# Altium PCB DelSolClock.PcbDoc
Units mil, origin at the board's own origin, x right, y up, seen from the top; angles counter-clockwise.
Board outline 2513.78 x 2789.76 mil, 2 copper layers (Top Layer, Bottom Layer); 69 components, 58 nets, 275 pads, 72 vias.
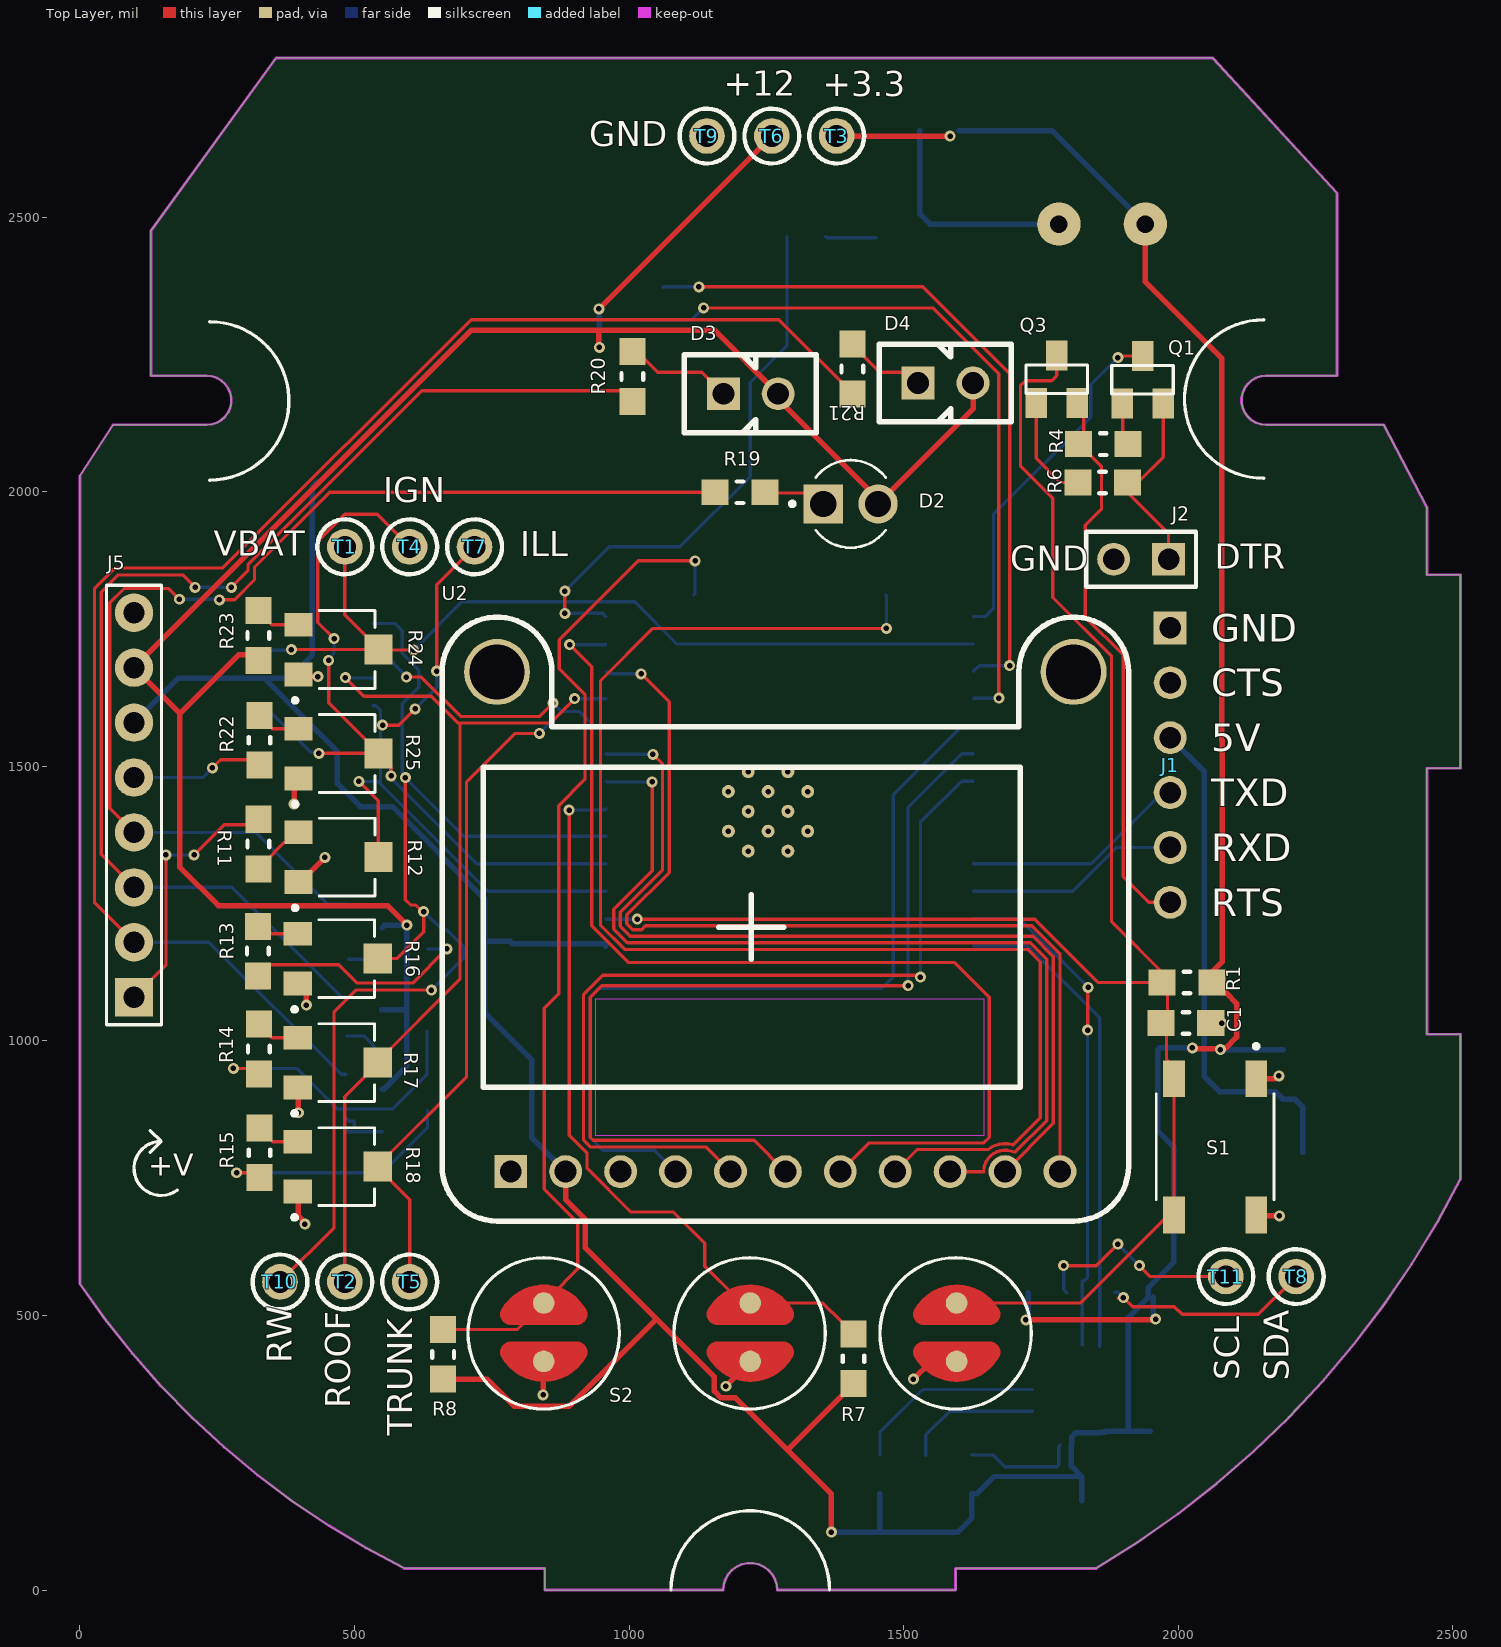
[diagram p0: Top Layer view]
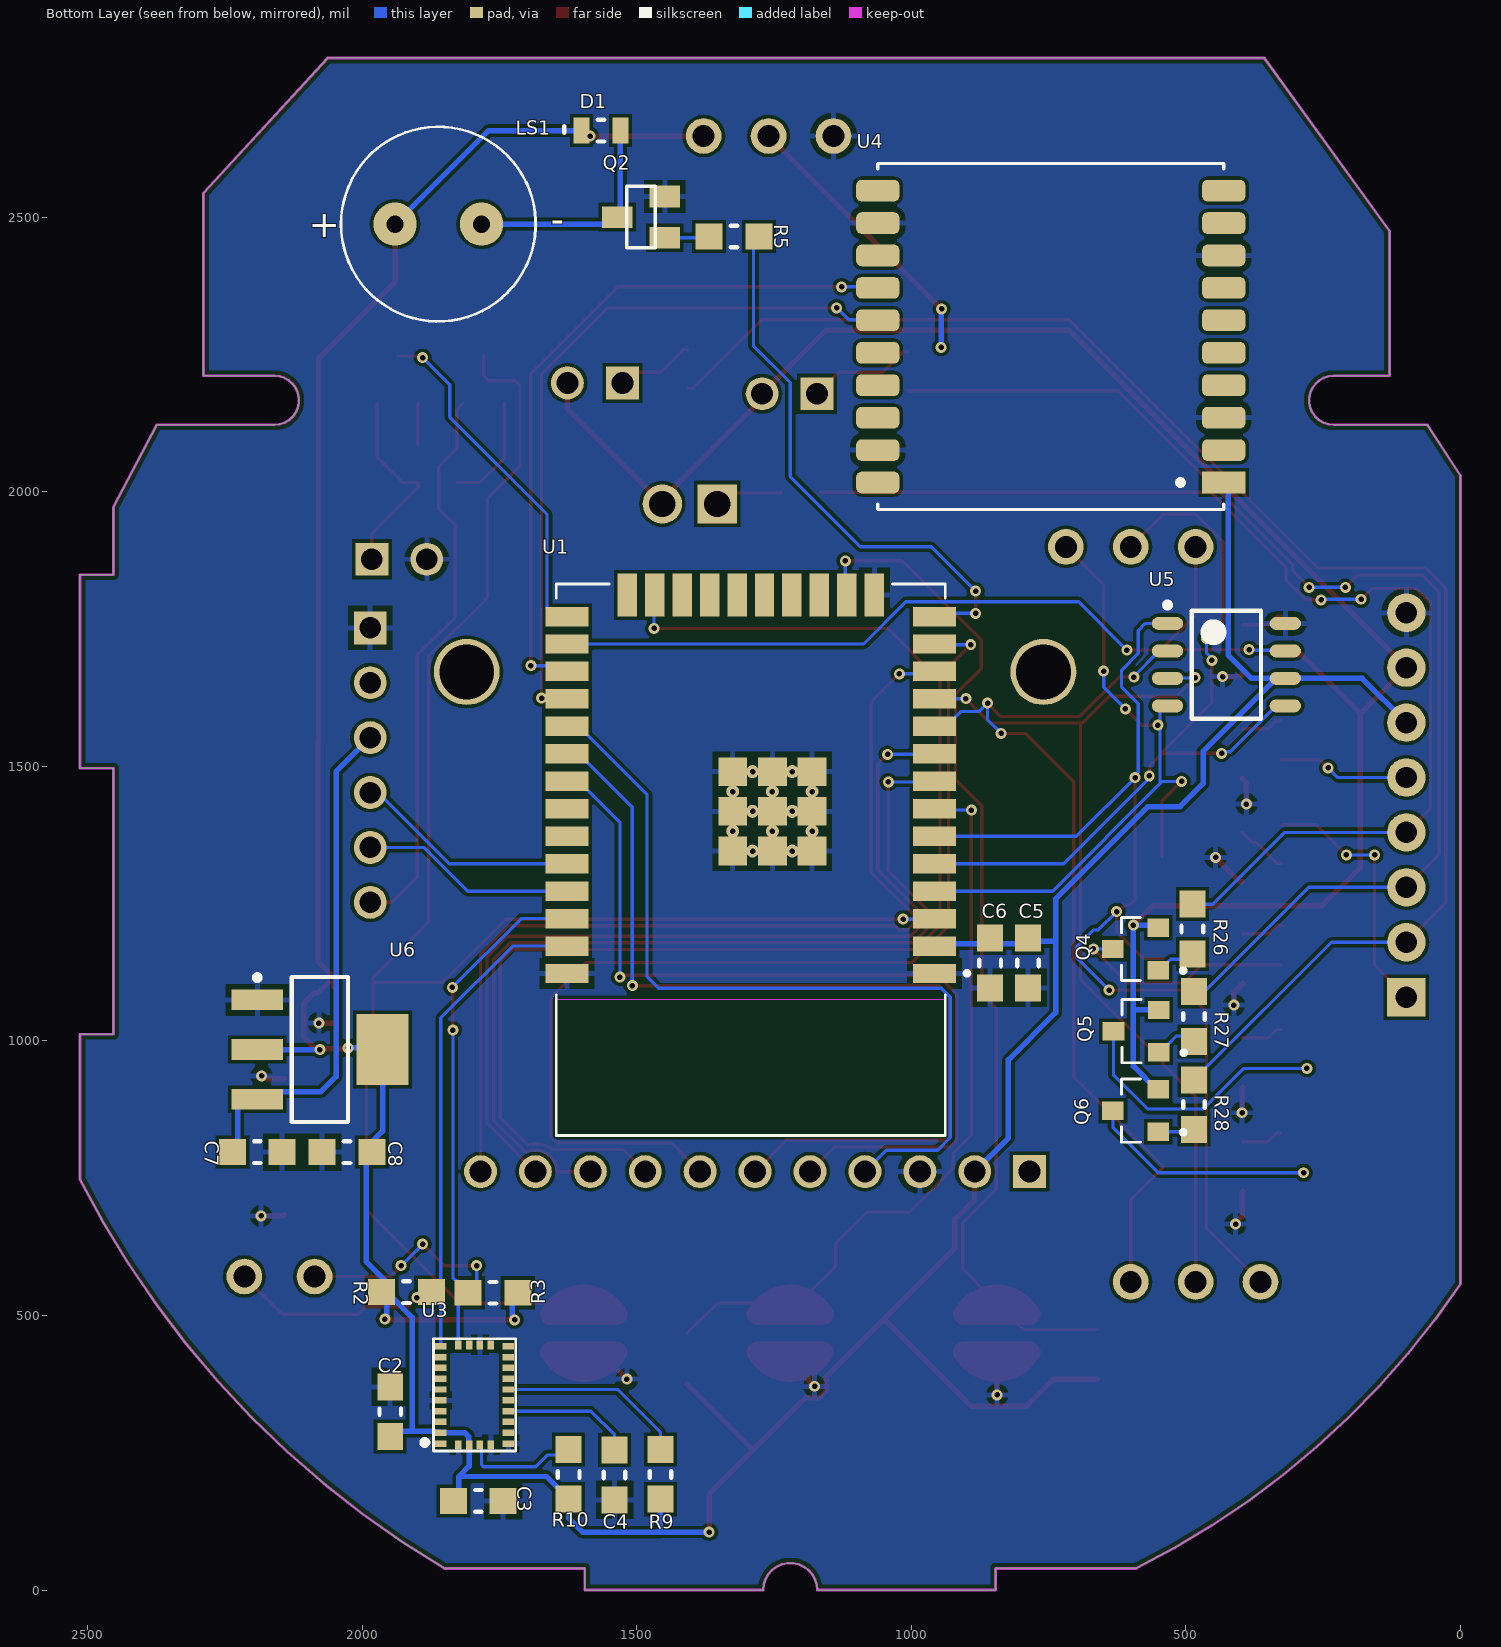
[diagram p1: Bottom Layer view, seen from below]

## Layer stack, top to bottom
Top Solder: solder mask 0.4, Solder Resist, Dk 3.5
Top Layer: signal copper 1.4
Dielectric 1: dielectric 12.6, FR-4, Dk 4.8
Bottom Layer: signal copper 1.4
Bottom Solder: solder mask 0.4, Solder Resist, Dk 3.5

## Board outline
0,2029.13 0,557.09 46.2,492.52 95.63,430.4 148.17,370.89 203.68,314.14 262.02,260.3 323.04,209.51 386.57,161.9 452.44,117.6 520.5,76.72 590.55,39.37 846.46,39.37 846.46,0 1171.26,0 1172.34,10.23 1175.51,20.02 1180.66,28.93 1187.54,36.57 1195.87,42.62 1205.27,46.8 1215.33,48.94 1225.62,48.94 1235.68,46.8 1245.08,42.62 1253.4,36.57 1260.29,28.93 1265.43,20.02 1268.61,10.23 1269.69,0 1594.49,0 1594.49,39.37 1850.39,39.37 1926.02,87.07 1999.11,138.57 2069.47,193.74 2136.92,252.43 2201.28,314.5 2262.39,379.77 2320.07,448.08 2374.19,519.25 2424.6,593.1 2471.17,669.42 2513.78,748.03 2513.78,1012.2 2452.76,1012.2 2452.76,1496.46 2513.78,1496.46 2513.78,1848.82 2452.76,1848.82 2452.76,1972.05 2374.02,2121.65 2159.65,2121.65 2150.36,2122.63 2141.47,2125.52 2133.38,2130.19 2126.44,2136.44 2120.95,2144 2117.15,2152.53 2115.21,2161.67 2115.21,2171.01 2117.15,2180.15 2120.95,2188.68 2126.44,2196.24 2133.38,2202.49 2141.47,2207.16 2150.36,2210.05 2159.65,2211.02 2288.98,2211.02 2288.98,2543.7 2062.6,2789.76 357.09,2789.76 129.13,2474.8 129.13,2211.02 230.91,2211.02 240.2,2210.05 249.08,2207.16 257.17,2202.49 264.11,2196.24 269.6,2188.68 273.4,2180.15 275.35,2171.01 275.35,2161.67 273.4,2152.53 269.6,2144 264.11,2136.44 257.17,2130.19 249.08,2125.52 240.2,2122.63 230.91,2121.65 60.24,2121.65

## Design rules (kind name [scope] priority, off if disabled: settings)
BoardOutlineClearance [All] p1: gap=10 ignorepadtopadclearanceinfootprint=FALSE
Clearance Clearance_POWER [InNetClass('POWER') vs IsTrack] p1: gap=6 ignorepadtopadclearanceinfootprint=FALSE
Clearance [All] p2: gap=6 ignorepadtopadclearanceinfootprint=FALSE
ComponentClearance [All] p1: gap=5 collisioncheckmode=3 verticalgap=10 showdistances=FALSE
HoleSize [All] p1: absolutevalues=TRUE maxlimit=500 minlimit=10 maxpercent=80.000 minpercent=20.000
HoleToHoleClearance [All] p1: gap=6 allowstackedmicrovias=TRUE
MinimumSolderMaskSliver [All] p1: minsoldermaskwidth=3
PolygonConnect [All] p1: connectstyle=Relief reliefconductorwidth=10 reliefentries=4 polygonreliefangle="90 Angle" airgapwidth=10
RoutingVias [All] p1: holewidth=10 width=20 viastyle="Through Hole" minholewidth=10 minwidth=20 maxholewidth=10 maxwidth=20
SilkToSilkClearance [All] p1: silktosilkclearance=6
SilkToSolderMaskClearance [IsPad] p1 off: minsilkscreentomaskgap=6 clearancetoexposedcopper=TRUE
SolderMaskExpansion [All] p1: expansion=4 istentingtop=FALSE
Width Width_High_Power [InNetClass('HIGH_POWER')] p1: maxlimit=70 minlimit=70 preferedwidth=70
Width Width_Power [InNetClass('POWER')] p2: maxlimit=70 minlimit=10 preferedwidth=10 minimp=50.000000 maximp=50.000000 favimp=50.000000
Width [All] p3: maxlimit=60 minlimit=6 preferedwidth=6 minimp=50.000000 maximp=50.000000 favimp=50.000000
24 further rules are at their usual default settings.

## Classes and differential pairs
net class POWER: 3V3 +12 GND NetC7_2 NetD1_2

## Components (designator, comment, footprint, x,y, rotation, side; value= is the part's Value field where it differs from the comment)
C1 "CL21B105KOFNNNG" "0805 HD - Long" 2013.78,1032.48 r180 top value=1uF
C2 "CL21B104KBCNFNC" "0805 HD - Long" 1948.82,324.8 r90 bottom value=100nF
C3 "CC0805KRX7R9BB124" "0805 HD - Long" 1788.39,162.4 r180 bottom value=120nF
C4 "CL21B105KOFNNNG" "0805 HD - Long" 1540.35,209.65 r90 bottom value=1uF
C5 "Cap" "0805 HD - Long" 787.4,1141.73 r90 bottom value=22uF
C6 "Cap" "0805 HD - Long" 856.3,1141.73 r90 bottom value=0.1uF
C7 "Cap" "0805 HD - Long" 2190.94,797.24 r0 bottom value=10uF
C8 "Cap" "0805 HD - Long" 2027.56,797.24 r180 bottom value=100uF
D1 "SD0805S020S1R0" "0805 HD - Polarized" 1564.96,2657.48 r180 bottom
D2 "WP132XGD" LEDRD254W50D405H1055 1403.35,1977.76 r0 top locked
D3 "SSL-LX4673ID-LA20" "LED, SSL-LX4673ID-LA20" 1221.46,2178.35 r0 top locked
D4 "SSL-LX4673ID-LA20" "LED, SSL-LX4673ID-LA20" 1576.18,2198.03 r0 top locked
J1 "3309" "Conn, 3309" 1985.24,1752.17 r0 top
J2 "90120-0122" "CONN, HEADER, 2x1 0.1 Pitch Unshrouded" 1982.28,1876.97 r180 top
J5 "68000-408HLF" "Conn, Header, 8x1 0.1 Pitch Unshrouded" 98.43,1079.53 r90 top
LS1 "CMT-0904-83T" XDCR_CMT-0904-83T 1861.22,2487.2 r180 bottom
Q1 "MMBT2222A" SOT23 1935.04,2203.74 r0 top
Q2 "MMBT2222A" SOT23 1492.13,2500 r90 bottom
Q3 "MMBT2222A" SOT23 1778.54,2204.72 r0 top
Q4 "MMBT2907A" TRANS_MMBT2907A 591.54,1167.32 r0 bottom
Q5 "MMBT2907A" TRANS_MMBT2907A 590.55,1017.72 r0 bottom
Q6 "MMBT2907A" TRANS_MMBT2907A 591.54,873.03 r0 bottom
R1 "RNCP0805FTD10K0" "0805 HD - Long" 2015.75,1106.3 r0 top value=10K
R2 "AC0805FR-7W2KL" "0805 HD - Long" 1919.29,542.32 r0 bottom value=2K
R3 "AC0805FR-7W2KL" "0805 HD - Long" 1761.81,541.34 r180 bottom value=2K
R4 "RNCP0805FTD10K0" "0805 HD - Long" 1863.19,2086.61 r180 top value=10K
R5 "ESR10EZPJ181" "0805 HD - Long" 1322.83,2464.57 r0 bottom value=180
R6 "RNCP0805FTD10K0" "0805 HD - Long" 1862.2,2016.73 r0 top value=10K
R7 "CRGH0805J1K0" "0805 HD - Long" 1408.46,421.26 r270 top value=1K
R8 "CRGH0805J1K0" "0805 HD - Long" 661.42,429.13 r270 top value=1K
R9 "RNCP0805FTD10K0" "0805 HD - Long" 1456.69,210.63 r90 bottom value=10K
R10 "RNCP0805FTD10K0" "0805 HD - Long" 1624.02,210.63 r90 bottom value=10K
R11 "CRGH0805J1K0" "0805 HD - Long" 324.8,1358.27 r90 top value=1K
R12 "PVG3G104C01R00" TRIM_PVG3G104C01R00 470.47,1334.65 r90 top
R13 "CRGH0805J1K0" "0805 HD - Long" 323.82,1163.39 r270 top value=1K
R14 "CRGH0805J1K0" "0805 HD - Long" 325.79,985.24 r270 top value=1K
R15 "CRGH0805J1K0" "0805 HD - Long" 326.77,796.26 r270 top value=1K
R16 "PVG3G104C01R00" TRIM_PVG3G104C01R00 469.49,1149.8 r90 top
R17 "PVG3G104C01R00" TRIM_PVG3G104C01R00 469.49,960.43 r90 top
R18 "PVG3G104C01R00" TRIM_PVG3G104C01R00 469.49,771.06 r90 top
R19 "ESR10EZPJ471" "0805 HD - Long" 1201.77,1999.02 r0 top value=470
R20 "ESR10EZPJ471" "0805 HD - Long" 1005.91,2209.65 r90 top value=470
R21 "ESR10EZPJ471" "0805 HD - Long" 1406.5,2223.43 r90 top value=470
R22 "CRGH0805J1K0" "0805 HD - Long" 326.77,1547.24 r90 top value=1K
R23 "CRGH0805J1K0" "0805 HD - Long" 324.8,1738.19 r90 top value=1K
R24 "PVG3G104C01R00" TRIM_PVG3G104C01R00 470.47,1712.6 r90 top
R25 "PVG3G104C01R00" TRIM_PVG3G104C01R00 470.47,1523.23 r90 top
R26 "CRGH0805J100K" "0805 HD - Long" 488.19,1203.74 r270 bottom value=100K
R27 "CRGH0805J100K" "0805 HD - Long" 485.24,1044.29 r270 bottom value=100K
R28 "CRGH0805J100K" "0805 HD - Long" 485.24,883.86 r270 bottom value=100K
S1 "8-1437565-0" SW_8-1437565-0 2066.93,807.09 r270 top
S2 "Sw, DelSolClock" "SW, DELSOLCLOCK" 844.49,467.52 r0 top locked
T1 "Test Point" "5002 Test Point" 482.28,1899.61 r0 top
T2 "Test Point" "5002 Test Point" 482.28,561.02 r0 top
T3 "Test Point" "5002 Test Point" 1377.95,2647.64 r0 top
T4 "Test Point" "5002 Test Point" 600.39,1899.61 r0 top
T5 "Test Point" "5002 Test Point" 600.39,561.02 r0 top
T6 "Test Point" "5002 Test Point" 1259.84,2647.64 r0 top
T7 "Test Point" "5002 Test Point" 718.5,1899.61 r0 top
T8 "Test Point" "5002 Test Point" 2214.57,570.87 r0 top
T9 "Test Point" "5002 Test Point" 1141.73,2647.64 r0 top
T10 "Test Point" "5002 Test Point" 364.17,561.02 r0 top
T11 "Test Point" "5002 Test Point" 2086.61,570.87 r0 top
U1 "ESP-WROOM-32" "MODULE, ESP32-WROOM-32" 1292.32,1329.72 r0 bottom
U2 "4383" "MODULE, ADAFRUIT TFT" 659.45,671.81 r0 top locked
U3 "BNO055" LGA28R50P4X10_380X520X100 1795.28,355.32 r90 bottom
U4 "CD-PA1616D" "MODULE, CD-PA1616D" 431.1,2016.73 r0 bottom
U5 "DA112S1RL" "IC, DA112S1RL" 426.18,1685.04 r180 bottom
U6 "TLV1117-33CDCYR" "SOT230P700X180-4N Regulator 3.3V 800mA" 2076.77,984.25 r180 bottom

## Footprints (in the part's own frame and the unit in brackets; to place one, negate y for a bottom-side part, rotate by r counter-clockwise, add the part's x,y. Pads: shape width x height; smd on the part's side, far side on the other; paste and mask are expansions set on the pad)
"0805 HD - Long" [mm] "Chip Resistor, 2-Leads, Body 2.00x1.25mm, IPC High Density"
  rect 1.25x1.2 smd: 1(-1.15,0) 2(1.15,0)
  silkscreen extent -0.15,-0.5 0.15,0.5, body extent -1,-0.63 1,0.63, height 0.95
"0805 HD - Polarized" [mm] "Chip Resistor, 2-Leads, Body 2.00x1.25mm, IPC High Density"
  rect 0.75x1.2 smd: 1(-0.9,0) 2(0.9,0)
  silkscreen extent -1.7,-0.5 0.15,0.5, body extent -1,-0.63 1,0.63, height 0.95
"5002 Test Point" [mil]
  round 65 hole 40: 1(0,0)
  silkscreen extent -50,-50 50,50
"Conn, 3309" [mil]
  rect 60x60 hole 39: 1(0,0)
  round 60 hole 39: 2(0,-100) 3(0,-200) 4(0,-300) 5(0,-400) 6(0,-500)
"CONN, HEADER, 2x1 0.1 Pitch Unshrouded" [mil]
  rect 60x60 hole 39: 1(0,0)
  round 60 hole 39: 2(100,0)
  silkscreen extent -50,-50 150,50
"Conn, Header, 8x1 0.1 Pitch Unshrouded" [mil] "Header, 8x1 0.1 Pitch Unshrouded"
  rect 70x70 hole 39: 1(0,0)
  round 70 hole 39: 2(100,0) 3(200,0) 4(300,0) 5(400,0) 6(500,0) 7(600,0) 8(700,0)
  silkscreen extent -50,-50 750,50
"IC, DA112S1RL" [mm] "SOIC, 8-Leads, Body 4.90x3.90mm, Pitch 1.27mm, IPC Medium Density"
  oval 1.45x0.6 smd: 1(-2.725,1.905) 2(-2.725,0.635) 3(-2.725,-0.635) 4(-2.725,-1.905) 5(2.725,-1.905) 6(2.725,-0.635) 7(2.725,0.635) 8(2.725,1.905)
  silkscreen extent -2.85,-2.5 1.6,2.88, body extent -2,-2.5 2,2.5, height 1.75
"LED, SSL-LX4673ID-LA20" [mil]
  rect 60x60 hole 40: 1(-50,0)
  round 60 hole 40: 2(50,0)
  silkscreen extent -121,-71 119,71
LEDRD254W50D405H1055 [mm]
  round 1.815 hole 1.21: A(1.27,0)
  rect 1.815x1.815 hole 1.21: C(-1.27,0)
  silkscreen extent -2.8,-2.03 1.62,2.03
LGA28R50P4X10_380X520X100 [mm]
  rect 0.3x0.525 smd: 1(-2.25,1.563) 6(-2.25,-1.562) 7(-1.75,-1.562) 8(-1.25,-1.562) 9(-0.75,-1.562) 10(-0.25,-1.562) 11(0.25,-1.562) 12(0.75,-1.562) 13(1.25,-1.562) 14(1.75,-1.562) 15(2.25,-1.562) 20(2.25,1.563) 21(1.75,1.563) 22(1.25,1.563) 23(0.75,1.563) 24(0.25,1.563) 25(-0.25,1.563) 26(-0.75,1.563) 27(-1.25,1.563) 28(-1.75,1.563)
  rect 0.425x0.3 smd: 2(-2.312,0.75) 3(-2.312,0.25) 4(-2.312,-0.25) 5(-2.312,-0.75) 16(2.312,-0.75) 17(2.312,-0.25) 18(2.312,0.25) 19(2.312,0.75)
  silkscreen extent -2.6,-1.9 2.6,2.4, body extent -2.6,-1.9 2.6,1.9, height 1.18
"MODULE, ADAFRUIT TFT" [mil]
  rect 60x60 hole 40: 1(125,90)
  round 60 hole 40: 2(225,90) 3(325,90) 4(425,90) 5(525,90) 6(625,90) 7(725,90) 8(825,90) 9(925,90) 10(1025,90) 11(1125,90)
  round 120 hole 100: ""(100,1000) ""(1150,1000)
  silkscreen extent 0,0 1250,1100
"MODULE, CD-PA1616D" [mm]
  rect 2x1 smd: 1(0,0)
  rrect50% 2x1 smd: 2(0,-1.5) 3(0,-3) 4(0,-4.5) 5(0,-6) 6(0,-7.5) 7(0,-9) 8(0,-10.5) 9(0,-12) 10(0,-13.5) 11(16,-13.5) 12(16,-12) 13(16,-10.5) 14(16,-9) 15(16,-7.5) 16(16,-6) 17(16,-4.5) 18(16,-3) 19(16,-1.5) 20(16,0)
  silkscreen extent 0,-14.75 16,1.25, body extent 0,-14.75 16,1.25, height 6.7
"MODULE, ESP32-WROOM-32" [mm]
  rect 2x0.9 smd: 1(-8.5,5.26) 2(-8.5,3.99) 3(-8.5,2.72) 4(-8.5,1.45) 5(-8.5,0.18) 6(-8.5,-1.09) 7(-8.5,-2.36) 8(-8.5,-3.63) 9(-8.5,-4.9) 10(-8.5,-6.17) 11(-8.5,-7.44) 12(-8.5,-8.71) 13(-8.5,-9.98) 14(-8.5,-11.25) 25(8.5,-11.25) 26(8.5,-9.98) 27(8.5,-8.71) 28(8.5,-7.44) 29(8.5,-6.17) 30(8.5,-4.9) 31(8.5,-3.63) 32(8.5,-2.36) 33(8.5,-1.09) 34(8.5,0.18) 35(8.5,1.45) 36(8.5,2.72) 37(8.5,3.99) 38(8.5,5.26)
  rect 0.9x2 smd: 15(-5.715,-12.25) 16(-4.445,-12.25) 17(-3.175,-12.25) 18(-1.905,-12.25) 19(-0.635,-12.25) 20(0.635,-12.25) 21(1.905,-12.25) 22(3.175,-12.25) 23(4.445,-12.25) 24(5.715,-12.25)
  rect 1.33x1.33 smd: PAD(-2.835,-4.075) PAD(-2.835,-2.24) PAD(-2.835,-0.405) PAD(-1,-4.075) PAD(-1,-2.24) PAD(-1,-0.405) PAD(0.835,-4.075) PAD(0.835,-2.24) PAD(0.835,-0.405)
  round 0.6 hole 0.254: PAD(-2.835,-3.157) PAD(-2.835,-1.322) PAD(-1.917,-4.075) PAD(-1.917,-2.24) PAD(-1.917,-0.405) PAD(-1,-3.157) PAD(-1,-1.322) PAD(-0.082,-4.075) PAD(-0.082,-2.24) PAD(-0.082,-0.405) PAD(0.835,-3.157) PAD(0.835,-1.322)
  Keep-Out Layer region: 9,6.45 -9,6.45 -9,12.75 9,12.75
  Keep-Out Layer region: 9,6.45 -9,6.45 -9,12.75 9,12.75
  silkscreen extent -10.1,-12.75 9,12.75
SOT23 [mm]
  rect 1x1.4 smd: 1(-0.95,-1.1) 2(0.95,-1.1) 3(0,1.1)
  silkscreen extent -1.42,-0.66 1.42,0.66
"SOT230P700X180-4N Regulator 3.3V 800mA" [mm] "SOT223, 4-Leads, Body 6.7x7.3mm (max), Pitch 2.30mm, IPC Medium Density, TI, TLV1117-33CDCYR"
  rect 2.4x0.95 smd: 1(-2.9,2.3) 2(-2.9,0) 3(-2.9,-2.3)
  rect 2.4x3.3 smd: 2(2.9,0)
  silkscreen extent -3.03,-3.35 1.3,3.45, body extent -1.85,-3.35 1.85,3.35, height 1.8
"SW, DELSOLCLOCK" [mm]
  round 1 smd: 1(0,1.4) 2(0,-1.3) 3(9.55,1.4) 4(9.55,-1.3) 5(19.1,1.4) 6(19.1,-1.3)
  Top Layer lines w1: -1.516,-0.875 ccw(c0,0) 1.516,-0.875 -1.516,-0.875 ; -1.516,0.875 cw(c0,0) 0.32,1.72 cw(c0,0) 1.516,0.875 0,0.875 -0.525,0.875 -1.516,0.875 ; 8.034,-0.875 ccw(c9.55,0) 11.066,-0.875 8.034,-0.875 ; 8.034,0.875 cw(c9.55,0) 8.918,1.632 cw(c9.55,0) 10.6,1.4 cw(c9.55,0) 11.066,0.875 9.55,0.875 8.034,0.875 ; 17.584,-0.875 ccw(c19.1,0) 20.616,-0.875 17.584,-0.875 ; 17.584,0.875 cw(c19.1,0) 20.616,0.875 17.584,0.875
  silkscreen extent -3.5,-3.5 22.55,3.5
SW_8-1437565-0 [mm]
  rect 1.7x1 smd: 1(-3.15,1.9) 2(3.15,1.9) 3(-3.15,-1.9) 4(3.15,-1.9)
  silkscreen extent -4.75,-2.72 2.45,2.72
TRANS_MMBT2907A [mm]
  rect 1x0.85 smd: 1(-1.05,0.98) 2(-1.05,-0.98) 3(1.05,0)
  silkscreen extent -2.3,-1.46 0.65,1.46, body extent -1.05,-1.05 1.05,1.05, height 0.43
TRIM_PVG3G104C01R00 [mm]
  rect 1.1x1.3 smd: 1(-1.15,1.85) 3(1.15,1.85)
  rect 1.4x1.3 smd: 2(0,-1.85)
  silkscreen extent -2.45,-1.7 1.8,2.1, body extent -1.6,-0.82 1.6,0.82, height 0.8
XDCR_CMT-0904-83T [mm]
  round 2 hole 0.8: N(2,0) P(-2,0)
  silkscreen extent -4.5,-4.5 4.5,4.5

## Part data
C1 C2 C3 C4: library part Cap, "Capacitor"
  C1 C4: MFGPN=CL21B105KOFNNNG
  C2: MFGPN=CL21B104KBCNFNC
  C3: MFGPN=CC0805KRX7R9BB124
C5 C6 C7 C8: "Capacitor"
D1: library part Diode, "Diode", DST=Digikey, MFG="Panasonic - ECG"
D2: "Green 568nm LED Indication - Discrete 2.2V Radial", Package=None, Availability=Unavailable, MF="{'manufacturer': u'Kingbright'}", MP=WP132XGD, Price=None
D3 D4: library part "LED, SSL-LX4673ID-LA20", "LED, Red, 20mA, through hole, rectangular, 2V", DST=Digikey, DSTPN=67-1083-ND, ESTCOST=1.03, MFG="Lumex Opto/Components Inc.", MFGPN=SSL-LX4673ID-LA20
J1: library part "Conn, 3309", "Conn, Serial USB Adafruit CP2104 Friend", DST=Adafruit, DSTPN=3309, ESTCOST=5.95, MFG=Adafruit, MFGPN=3309
J2: library part "Conn, 90120-0122", "Header, 2x1 0.1\" Unshrouded Tin", Supplier Part Number 1=WM8072-ND, DST=Digikey, DSTPN=WM8072-ND, ESTCOST=0.121, MFG="Molex Connector Corporation", MFGPN=90120-0122, Supplier 1=Digi-Key
J5: library part "Conn, 68000-408HLF", "Header, 8x1 0.1\" Unshrouded Tin", DST=Digikey, DSTPN=609-3264-ND, ESTCOST=.149, MFG=FCI, MFGPN=68000-408HLF
LS1 S1: Package=None, Availability=Unavailable, Price=None
  LS1: MF="{'manufacturer': u'CUI Devices'}", MP=CMT-0904-83T
  S1: MF="{'manufacturer': u'TE Connectivity'}", MP=8-1437565-0
Q1 Q2 Q3: "<h3>2N2222 General Purpose NPN Transistor</h3>", Package=None, Availability=Unavailable, MF="{'manufacturer': u'ON Semiconductor'}", MP=MMBT2222A, Price=None
Q4 Q5 Q6: "350mW, PNP Small Signal Transistor", Package=None, Availability=Unavailable, MF="{'manufacturer': u'STMicroelectronics'}", MP=MMBT2907A, Price=None
R1 R2 R3 R4 R5 R6 R7 R8 R9 R10 R11 R13 R14 R15 R19 R20 R21 R22 R23 R26 R27 R28: library part Res, "Resistor"
  R1 R4 R6 R9 R10: MFGPN=RNCP0805FTD10K0
  R2 R3: MFGPN=AC0805FR-7W2KL
  R5: MFGPN=ESR10EZPJ181
  R7 R8 R11 R13 R14 R15 R22 R23: MFGPN=CRGH0805J1K0
  R19 R20 R21: MFGPN=ESR10EZPJ471
  R26 R27 R28: MFGPN=CRGH0805J100K
R12 R24 R25: "100 kOhms 0.25W, 1/4W Gull Wing Surface Mount Trimmer Potentiometer Cermet 1 Turn Top Adjustment", Package=None, Availability=Unavailable, MF="{'manufacturer': u'Bourns'}", MP=PVG3G104C01R00, Price=None
R16 R17 R18: "10 kOhms 0.25W, 1/4W Gull Wing Surface Mount Trimmer Potentiometer Cermet 1 Turn Top Adjustment", Package=None, Availability=Unavailable, MF="{'manufacturer': u'Bourns'}", MP=PVG3G104C01R00, Price=None
S2: "Switch, Del Sol Clock, elastomeric"
U1: library part "Module, ESP-WROOM-32", "Module, Wifi Module, ESP32 4MB Flash 520K RAM", DST=Adafruit, DSTPN=3320, ESTCOST=8.95, MFG=Espressif, MFGPN=ESP-WROOM-32
U2: library part "Module, Adafruit TFT", "Module, Display, Graphic TFT 240x135 Color, ST7789", DST=Adafruit, DSTPN=4383, ESTCOST=14.95, MFG=Adafruit, MFGPN=4383
U3: "BNO055 9-axis Absolute Orientation Sensor ( SiP ) w/Sensors and Sensor Fusion", Package=None, Availability=Unavailable, MF="{'manufacturer': u'Bosch'}", MP=BNO055, Price=None
U4: library part "Module, CD-PA1616D", "Module, GPS, module with integrated antenna", DST=Adafruit, DSTPN=5186, ESTCOST=19.95, MFG="CD Technology", MFGPN=CD-PA1616D
U5: library part "IC, DA112S1RL", "IC, TVS Diode, 6 channel"
U6: library part "IC, TLV1117-33CDCYR", "IC, Regulator 3.3V 800mA LDO 15V max SOT-223", DST=Digikey, DSTPN=296-21112-1-ND, ESTCOST=0.480, MFG="Texas Instruments", MFGPN=TLV1117-33CDCYR
T1 T2 T3 T4 T5 T6 T7 T8 T9 T10 T11: DST=Digikey, DSTPN=5002K-ND, ESTCOST=.293, MFG="Keystone Electronics", MFGPN=5002

## Via types
v1: diameter 20, hole 10, Top Layer to Bottom Layer, 72 vias

## Nets (pads, with @x,y where several pads share a name; then routed paths per layer and width w, separated by ;. In a path a pad name is that pad's centre, name@x,y a point inside that pad or via, vN(x,y) a via of type N, cw(c..) or ccw(c..) an arc to the next point about the centre after c; other vN are vias at no path point)
3V3: C2.1 C3.1 C5.2 C6.2 C8.2 D1.1 J5.6 LS1.P R1.2 R2.2 R3.2 R7.2 R8.2 R9.1 R10.1 T3.1 U1.2 U2.2 U3.3 U3.28 U4.1 U5.6 U6.2 | length 7991.2
  Top Layer w10: R8.2 741.35,383.86 790.89,334.32 890.42,334.32 1049.7,493.6 ; U2.2 884.45,710.9 920.5,674.85 920.5,622.81 1049.7,493.6 ; v1(1368.11,105.32) 1368.11,175.2 1289.37,253.94 ; T3.1 v1(1584.65,2647.64) ; R7.2 1408.46,375 1289.37,255.91 1289.37,253.94 ; v1(1722.44,492.13) v1@1948.82,492.13 ; LS1.P 1939.96,2381.89 2078.74,2243.11 2078.74,1546.26 2079.72,1545.28 2079.72,1143.7 2051.18,1115.16 R1.2@2051.18,1097.44 ; v1(2025.59,987.2) 2027.07,985.73 2075.3,985.73 v1(2076.77,984.25) 2078.68,986.17 2085.57,986.17 2106.3,1006.89 2106.3,1067.91 2086.54,1087.68 2079.65,1087.68 R1.2 ; 1049.7,493.6 1155.18,388.13 1155.18,362.36 1167.48,350.06 1193.24,350.06 1289.37,253.94
  Bottom Layer w10: J5.6 178.94,1660.04 U5.6 U5.6@335.63,1660.04 ; U4.1 423.23,2008.86 423.23,1702.76 380.51,1660.04 U5.6@335.63,1660.04 ; U2.2 823.03,823.23 823.03,965.35 737.01,1051.38 737.01,1181.1 ; U1.2 953.15,1177.17 787.4,1177.17 783.46,1181.1 737.01,1181.1 ; v1(1368.11,105.32) 1455.71,105.32 ; R9.1@1456.69,175.2 1456.69,106.3 1455.71,105.32 ; D1.1 1769.68,2657.48 LS1.P ; v1(1722.44,492.13) 1722.44,494.83 1726.38,498.77 R3.2@1726.38,541.34 ; C3.1@1823.82,162.4 1823.82,206.73 ; C2.1@1948.82,289.37 1908.95,289.37 ; R2.2@1954.72,533.46 1954.72,499.75 1958.66,495.82 v1(1958.66,493.11) ; v1(2025.59,987.2) 1965.55,987.2 1962.6,984.25 1962.6,835.63 1992.13,806.1 1992.13,597.44 1944.88,550.2 1944.88,532.48 1908.95,496.55 1908.95,289.37 ; v1(2076.77,984.25) U6.2@2190.94,984.25 ; U5.6@335.63,1660.04 468.8,1526.87 468.8,1468.21 510.53,1426.48 569.19,1426.48 737.01,1258.66 737.01,1181.1 ; 1455.71,105.32 1598.43,105.32 1624.02,130.91 1624.02,175.2 1623.52,175.69 1633.37,175.69 1664.41,206.73 1823.82,206.73 ; 1823.82,206.73 1805.12,225.43 U3.3 1806.02,265.18 1806.02,279.5 1812.94,286.42 1817.91,286.42 U3.28 1857.7,287.32 1867.03,287.32 1869.07,289.37 1908.95,289.37
+12: D2.A D3.2 D4.2 J5.7 Q4.2 Q5.2 Q6.2 R23.1 T6.1 | length 4066.4
  Top Layer w10: R23.1@324.8,1702.76 288.98,1702.76 182.09,1595.87 ; v1(595.47,1210.63) 560.04,1246.06 251.97,1246.06 182.09,1315.94 182.09,1595.87 ; v1(944.88,2332.68) T6.1 ; v1(945.87,2262.8) 944.88,2263.78 944.88,2294.29 ; D4.2@1626.18,2217.72 D4.2 1626.18,2150.59 D2.A 1453.35,1987.11 1271.46,2169 D3.2 1155.51,2294.29 944.88,2294.29 ; 182.09,1595.87 J5.7 713.19,2294.29 944.88,2294.29
  Bottom Layer w10: Q5.2 594.69,1056.3 595.47,1057.09 ; Q6.2 553.15,911.61 595.47,953.94 595.47,1057.09 ; Q4.2 554.92,1210.63 v1(595.47,1210.63) 595.47,1057.09 ; v1(944.88,2332.68) 945.37,2332.19 945.37,2263.29 v1(945.87,2262.8)
BUZZER: R5.1 U1.14 | length 1006.4
  Top Layer w6: v1(882.87,1778.54) v1(882.87,1818.9)
  Bottom Layer w6: v1(882.87,1778.54) 951.77,1778.54 U1.14 ; v1(882.87,1818.9) 963.58,1899.61 1092.52,1899.61 1220.47,2027.56 1220.47,2198.82 1287.4,2265.75 R5.1@1287.4,2464.57
DTR: J2.1 Q1.2 R6.2 | length 366.2
  Top Layer w6: Q1.2 1972.44,2062.99 1926.18,2016.73 1897.64,2016.73 1897.64,2007.87 1982.28,1923.23 J2.1
GND: C1.1 C2.2 C3.2 C4.1 C5.1 C6.1 C7.1 C8.1 J1.1 J2.2 J5.8 Q2.2 R12.1 R16.1 R17.1 R18.1 R24.1 R25.1 S1.1 S1.2 S2.2 S2.4 S2.6 T9.1 U1.1 U1.15 U1.38 U1.PAD U2.3 U3.2 U3.5 U3.6 U3.17 U3.25 U4.3 U4.8 U4.12 U4.19 U5.8 U6.1 | length 644.8
  Top Layer w10: v1(389.76,1431.1) 389.76,1470.08 R25.1 ; R18.1 397.64,724.8 397.64,680.86 409.45,669.04 v1(409.45,666.34) ; R17.1 397.64,914.17 v1(397.64,869.09) ; R16.1 396.46,1104.33 412.4,1088.39 v1(412.4,1064.96) ; R12.1 401.57,1289.37 445.87,1333.66 v1(445.87,1333.91) ; R24.1 401.57,1663.39 v1(433.07,1663.39) ; v1(843.5,355.32) 844,355.81 844,415.85 S2.2 ; v1(1176.18,371.06) 1176.18,371.56 1220.47,415.85 S2.4 ; v1(1517.72,383.86) 1550.2,416.34 S2.6 ; C1.1@2049.21,1032.48 v1(2078.74,1032.48) ; S1.2 2143.7,681.1 v1(2184.06,681.1) ; S1.1 2175.44,931.1 2180.36,936.02 v1(2183.07,936.02)
GPIO0: Q1.3 U1.25 | length 635.3
  Top Layer w6: v1@1892.72,2247.05 Q1.3
  Bottom Layer w6: U1.25 1648.62,1772.64 1663.34,1787.35 1663.34,1958.61 1840.55,2135.83 1840.55,2194.88 v1(1889.76,2244.09)
GPS_RX: U1.27 U4.14 | length 1298.7
  Top Layer w6: v1(1126.97,2373.03) 1534.45,2373.03 1692.91,2214.57 v1(1692.91,1683.07)
  Bottom Layer w6: U4.14@1062.01,2372.05 1062.99,2373.03 v1(1126.97,2373.03) ; U1.27 1637.4,1683.07 v1(1692.91,1683.07)
GPS_TX: U1.28 U4.15 | length 1345.7
  Top Layer w6: v1(1135.83,2334.65) 1553.15,2334.65 1673.23,2214.57 v1(1673.23,1624.02)
  Bottom Layer w6: U4.15@1023.62,2312.99 1114.17,2312.99 v1(1135.83,2334.65) ; U1.28 1628.35,1624.02 v1(1673.23,1624.02)
HOUR: R8.1 S2.1 U1.16 | length 1863.8
  Top Layer w6: R8.1 796.26,474.41 823.82,501.97 S2.1 ; S2.1@857.1,535.25 906.5,584.65 906.5,669.05 845.45,730.1 845.45,1059.19 871.75,1085.49 871.75,1428.15 919.59,1475.99 919.59,1630.9 872.73,1677.76 872.73,1730.02 1016.73,1874.02 v1(1120.08,1874.02)
  Bottom Layer w6: U1.16 1120.08,1814.76 v1(1120.08,1874.02)
IGN: R25.2 T4.1 U1.5 U5.5 | length 1422.7
  Top Layer w6: v1(435.04,1523.62) 542.91,1523.62 R25.2 ; v1(452.76,1692.91) 452.76,1615.75 543.31,1525.2 R25.2 ; v1(462.6,1732.28) 433.07,1761.81 433.07,1909.45 482.28,1958.66 541.34,1958.66 T4.1 ; v1(566.7,1482.43) 565.9,1483.23 565.9,1500.64 R25.2
  Bottom Layer w6: U5.5 335.63,1610.04 419.37,1526.3 432.36,1526.3 v1(435.04,1523.62) ; v1(452.76,1692.91) 452.76,1696.7 462.6,1706.54 v1(462.6,1732.28) ; v1(566.7,1482.43) 569.38,1479.75 569.38,1475.6 722.34,1322.64 U1.5
ILL: R12.2 T7.1 U1.4 U5.4 | length 1247.2
  Top Layer w6: v1(507.87,1472.44) 543.31,1437.01 R12.2 ; v1(551.18,1574.8) 580.71,1574.8 v1(610.24,1604.33) ; v1(649.61,1673.23) 649.61,1830.71 T7.1
  Bottom Layer w6: v1(507.87,1472.44) 543.03,1472.44 547.2,1468.27 ; U5.4 539.06,1610.04 547.2,1601.9 547.2,1468.27 ; v1(610.24,1604.33) 649.61,1643.7 v1(649.61,1673.23) ; U1.4 742.83,1272.64 547.2,1468.27
MIN: R7.1 S2.3 U1.7 | length 1340
  Top Layer w6: v1(890.75,1420.28) 890.75,828.33 923.45,795.63 923.45,767.66 1002.75,688.35 1080.49,688.35 1137.8,631.05 1137.8,589.57 1195.59,531.77 ; S2.3 1261.81,522.64 1352.36,522.64 1386.86,488.14 1387.84,488.14 1408.46,467.52 R7.1
  Bottom Layer w6: v1(890.75,1420.28) 955.32,1420.28 U1.7
MISO: U1.31 U2.5 | length 1595.1
  Top Layer w6: U2.5 1139.5,806.76 929.29,806.76 916.99,819.06 916.99,1084.49 951.9,1119.39 1527.26,1119.39 v1(1530.51,1116.14)
  Bottom Layer w6: v1(1530.51,1116.14) 1530.51,1397.84 1605.31,1472.64 U1.31
MOSI: U1.30 U2.6 | length 1708.5
  Top Layer w6: U2.6 1227.5,818.76 934.26,818.76 928.99,824.03 928.99,1079.52 949.87,1100.39 v1(1507.87,1100.39)
  Bottom Layer w6: v1(1507.87,1100.39) 1507.87,1425.2 1605.31,1522.64 U1.30
NetC4_2: C4.2 U3.9 | length 248.7
  Bottom Layer w6: C4.2@1540.35,245.08 1540.35,282.48 1583.66,325.79 U3.9
NetC7_2: C7.2 J1.3 U6.3 | length 927.5
  Bottom Layer w10: J1.3 2047.24,1490.16 2047.24,935.04 2074.88,907.4 2177.24,907.4 U6.3 2212.68,893.7 2226.38,880 C7.2@2226.38,797.24
NetD1_2: D1.2 LS1.N Q2.3 | length 412.3
  Bottom Layer w10: D1.2 1529.53,2505.91 Q2.3 1548.23,2487.2 LS1.N
NetD2_C: D2.C R19.2 | length 97.1
  Top Layer w6: R19.2@1237.2,1999.02 1238.78,1997.44 D2.C@1333.66,1997.44
NetD3_1: D3.1 R20.2 | length 197.3
  Top Layer w6: R20.2 1014.76,2254.92 1051.97,2217.72 1132.09,2217.72 D3.1
NetD4_1: D4.1 R21.2 | length 136.7
  Top Layer w6: R21.2@1406.5,2258.86 1415.35,2258.86 1456.5,2217.72 D4.1@1526.18,2217.72
NetJ5_1: J5.1 R11.2 | length 474.2
  Top Layer w6: J5.1 156.5,1137.6 v1(156.5,1338.58) ; v1(207.68,1338.58) 262.79,1393.7 R11.2@324.8,1393.7
  Bottom Layer w6: v1(156.5,1338.58) v1(207.68,1338.58)
NetJ5_2: J5.2 R21.1 R28.1 | length 2793.8
  Top Layer w6: J5.2 26.57,1251.38 26.57,1823.82 63.98,1861.22 260.32,1861.22 712.09,2312.99 1272.64,2312.99 1397.64,2187.99 R21.1@1406.5,2187.99
  Bottom Layer w6: J5.2 234.84,1179.53 475.39,938.98 R28.1@484.25,938.98
NetJ5_3: J5.3 R20.1 R27.1 | length 2176.5
  Top Layer w6: J5.3 38.57,1339.38 38.57,1817.12 69.88,1848.43 187.01,1848.43 v1(209.65,1825.79) ; v1(275.59,1825.79) 305.82,1856.02 305.82,1867.13 622.75,2184.06 R20.1@1005.91,2184.06
  Bottom Layer w6: J5.3 276.57,1279.53 476.38,1079.72 R27.1@485.24,1079.72 ; v1(209.65,1825.79) v1(275.59,1825.79)
NetJ5_4: J5.4 R19.1 R26.1 | length 2105.7
  Top Layer w6: J5.4 54.43,1423.53 54.43,1797.75 80.2,1823.53 161.71,1823.53 v1(181.1,1804.13) ; v1(253.94,1803.15) 281.5,1803.15 317.82,1839.48 317.82,1862.16 454.68,1999.02 R19.1@1166.34,1999.02
  Bottom Layer w6: J5.4 320.28,1379.53 450.79,1249.02 R26.1 ; v1(181.1,1804.13) 252.95,1804.13 v1(253.94,1803.15)
NetJ5_5: J5.5 R22.1 | length 241.7
  Top Layer w6: v1(241.14,1497.05) 255.91,1511.81 R22.1@326.77,1511.81
  Bottom Layer w6: J5.5 223.62,1479.53 v1(241.14,1497.05)
NetQ1_1: Q1.1 R4.1 | length 74.2
  Top Layer w6: Q1.1 1898.62,2159.45 R4.1@1898.62,2086.61
NetQ2_1: Q2.1 R5.2 | length 91.4
  Bottom Layer w6: R5.2@1358.27,2464.57 1360.24,2462.6 Q2.1
NetQ3_1: Q3.1 R6.1 | length 204.4
  Top Layer w6: Q3.1 1741.14,2061.02 1785.43,2016.73 R6.1@1826.77,2016.73
NetQ4_1: Q4.1 R26.2 | length 69.3
  Bottom Layer w6: R26.2@489.17,1148.62 527.36,1148.62 547.24,1128.74 Q4.1
NetQ4_3: Q4.3 R13.2 | length 418.5
  Top Layer w6: R13.2@324.8,1138.78 471.46,1138.78 504.92,1105.32 606.3,1105.32 v1(668.31,1167.32)
  Bottom Layer w6: Q4.3 v1(668.31,1167.32)
NetQ5_1: Q5.1 R27.2 | length 77.1
  Bottom Layer w6: R27.2@485.24,1008.86 517.86,1008.86 532.53,994.19 532.53,992.87 546.26,979.13 Q5.1
NetQ5_3: Q5.3 R14.2 | length 534.6
  Top Layer w6: v1(279.53,949.8) R14.2@325.79,949.8
  Bottom Layer w6: v1(279.53,949.8) 394.68,949.8 468.5,875.98 569.88,875.98 631.89,937.99 Q5.3
NetQ6_1: Q6.1 R28.2 | length 93
  Bottom Layer w6: R28.2@484.25,860.19 490.6,853.84 499.51,853.84 R28.2@499.51,845.35 ; R28.2 489.37,834.45 Q6.1
NetQ6_3: Q6.3 R15.2 | length 453.9
  Top Layer w6: v1(285.43,759.84) 325.79,759.84 R15.2@326.77,760.83
  Bottom Layer w6: v1(285.43,759.84) 550.2,759.84 632.87,842.52 Q6.3
NetR9_2: R9.2 U3.11 | length 350.6
  Bottom Layer w6: R9.2@1456.69,246.06 1456.69,287.4 1534.45,365.16 U3.11
NetR10_2: R10.2 U3.4 | length 206.5
  Bottom Layer w6: R10.2@1624.02,246.06 1662.4,246.06 1684.05,224.41 1779.01,224.41 1782.53,227.92 1782.53,261.37 U3.4
NetR11_1: R11.1 R12.3 | length 96.5
  Top Layer w6: R11.1@324.8,1322.83 333.66,1322.83 372.1,1361.27 378.98,1361.27 R12.3
NetR13_1: R13.1 R16.3 | length 78.3
  Top Layer w6: R13.1@324.8,1210.63 333.66,1210.63 349.21,1195.08 R16.3
NetR14_1: R14.1 R17.3 | length 77.1
  Top Layer w6: R14.1@325.79,1020.67 334.65,1020.67 349.61,1005.71 R17.3
NetR15_1: R15.1 R18.3 | length 76.2
  Top Layer w6: R15.1@326.77,831.69 335.63,831.69 350.98,816.34 R18.3
NetR22_2: R22.2 R25.3 | length 76.7
  Top Layer w6: R22.2@326.77,1582.68 335.63,1582.68 349.8,1568.5 R25.3
NetR23_2: R23.2 R24.3 | length 79.4
  Top Layer w6: R23.2@324.8,1773.62 333.66,1773.62 349.41,1757.87 R24.3
RESET: C1.2 Q3.3 R1.1 S1.3 S1.4 S2.5 U1.3 | length 3260.9
  Top Layer w6: v1(1014.76,1221.46) 1738.48,1221.46 1853.64,1106.3 R1.1@1980.31,1106.3 ; S2.5 1821.85,522.64 1991.14,691.93 S1.4@1991.14,705.71 ; Q3.3 1778.54,2211.47 1769.16,2202.09 1721.84,2202.09 1712.46,2192.7 1712.46,2047.39 1771.51,1988.33 1771.51,1807.33 1878.45,1700.39 1878.45,1217.02 1980.31,1115.16 R1.1@1980.31,1106.3 ; S1.3@1991.14,953.74 1978.35,966.54 1978.35,1032.48 1980.31,1034.45 R1.1@1980.31,1106.3 ; S1.4@1992.13,686.02 S1.3
  Bottom Layer w6: U1.3 958.86,1221.46 v1(1014.76,1221.46)
ROOF: R17.2 T2.1 U1.11 U5.3 | length 1682.5
  Top Layer w6: T2.1 482.28,898.42 542.32,958.46 R17.2 542.32,962.4 691.93,1112.01 691.93,1578.74 ; v1(483.27,1661.42) 517.09,1627.6 639.56,1627.6 688.41,1578.74 691.93,1578.74 ; v1(900.59,1623.03) 856.3,1578.74 691.93,1578.74
  Bottom Layer w6: v1(483.27,1661.42) 483.96,1660.73 532.78,1660.73 U5.3 ; v1(900.59,1623.03) 957.28,1623.03 U1.11
RTS: J1.6 Q3.2 R4.2 | length 1026.4
  Top Layer w6: Q3.2 1827.76,2149.61 1827.76,2086.61 1827.76,2077.76 1860.24,2045.28 1860.24,1968.5 1830.71,1938.98 1830.71,1771.65 1899.61,1702.76 1899.61,1299.21 1946.24,1252.58 1984.82,1252.58 J1.6
RW: R16.2 T10.1 U1.6 U5.1 | length 2097.5
  Top Layer w6: T10.1 462.6,659.45 462.6,1053.15 501.97,1092.52 v1(639.76,1092.52) ; R16.2 576.97,1149.8 625.98,1198.82 v1(625.98,1235.24) 623.45,1235.24 611.28,1247.4 602.01,1247.4 592.52,1256.89 v1(592.52,1479.33)
  Bottom Layer w6: U5.1 573.62,1760.04 586.61,1747.05 586.61,1705.71 617.13,1675.2 617.13,1644.19 586.61,1613.68 586.61,1489.02 592.52,1483.12 v1(592.52,1479.33) 699.21,1372.64 U1.6 ; v1(625.98,1235.24) 659.31,1201.91 668.17,1201.91 698.82,1171.26 698.82,1151.57 v1(639.76,1092.52)
RXD: J1.4 U1.34 | length 411.9
  Bottom Layer w6: U1.34 1841.1,1322.64 1970.63,1452.17 J1.4
SCK: U1.29 U2.4 | length 1533
  Bottom Layer w6: U2.4 1045.45,800.81 952.21,800.81 928.99,824.03 928.99,1079.52 945.4,1095.92 1459.91,1095.92 1481.11,1117.13 1481.11,1448.43 1605.31,1572.64 U1.29
SCL: R3.1 T11.1 U1.36 U3.19 | length 1306.7
  Top Layer w6: v1(1791.34,590.55) 1850.39,590.55 v1(1889.76,629.92) ; v1(1834.65,1019.68) 1835.14,1020.18 1835.14,1096.95 v1(1835.63,1097.44) ; v1(1929.13,590.55) 1948.82,570.87 T11.1
  Bottom Layer w6: U1.36 1710.43,1222.64 v1(1835.63,1097.44) ; v1(1791.34,590.55) 1791.34,547.24 R3.1@1797.24,541.34 ; U3.19 1824.8,559.06 R3.1@1827.76,562.01 ; R3.1@1824.8,562.01 R3.1@1827.76,562.01 ; v1(1834.65,1019.68) 1834.65,568.9 R3.1@1827.76,562.01 ; v1(1889.76,629.92) v1(1929.13,590.55)
SD_CS: U1.9 U2.10 | length 1677.9
  Top Layer w6: v1(1043.31,1521.65) 1060.83,1504.13 1060.83,1311.37 983.76,1234.3 983.76,1208.62 1001.92,1190.46 1735.54,1190.46 1772.45,1153.55 1772.45,849.81 U2.10
  Bottom Layer w6: U1.9 958.66,1521.65 v1(1043.31,1521.65)
SDA: R2.1 T8.1 U1.37 U3.20 | length 1268.7
  Top Layer w6: v1@1890.26,531.5 v1@1901.08,531.5 ; v1(1900.1,532.48) v1@1901.08,531.5 ; T8.1 2145.67,501.97 2006.89,501.97 1992.97,515.88 1916.69,515.88 v1@1901.08,531.5
  Bottom Layer w6: U1.37 1725.98,1172.64 1856.79,1041.83 U3.20 ; R2.1@1883.86,542.32 1890.26,542.32 v1(1900.1,532.48)
TFT_CS: U1.13 U2.7 | length 1925
  Top Layer w6: v1(891.73,1721.46) 932.09,1681.1 932.09,1209.38 998.89,1142.57 1592.59,1142.57 1655.65,1079.52 1655.65,824.03 1645.79,814.17 1436.8,814.17 U2.7
  Bottom Layer w6: v1(891.73,1721.46) 956.5,1721.46 U1.13
TFT_DC: U1.8 U2.9 | length 1709
  Top Layer w6: v1(1041.83,1471.46) 1041.83,1309.34 971.76,1239.27 971.76,1203.65 996.95,1178.46 1730.57,1178.46 1760.45,1148.58 1760.45,854.78 1703.37,797.7 1700.88,797.7 ; U2.9 1645.45,761.81 cw(c1684.45,761.81) 1695.13,799.32 1700.85,797.7
  Bottom Layer w6: U1.8 958.86,1471.46 v1(1041.83,1471.46)
TFT_LIT: U1.12 U2.11 | length 1787.6
  Top Layer w6: v1(1021.65,1668.31) 1072.83,1617.13 1072.83,1306.4 995.76,1229.33 995.76,1213.59 1006.89,1202.46 1022.63,1202.46 1029.63,1209.46 1733.51,1209.46 1784.45,1158.52 U2.11
  Bottom Layer w6: U1.12 962.01,1668.31 v1(1021.65,1668.31)
TFT_RESET: U1.23 U2.8 | length 2482.5
  Top Layer w6: v1(1468.5,1750.98) 1043.31,1750.98 947.83,1655.51 947.83,1210.6 991.98,1166.46 1725.6,1166.46 1748.45,1143.61 1748.45,859.75 1699.31,810.61 1698.41,810.86 ccw(c1684.45,761.81) 1698.21,810.92 1696.79,811.32 1696.69,811.32 ccw(c1684.45,761.81) 1653.26,802.17 1524.8,802.17 U2.8
  Bottom Layer w6: U1.23 1468.5,1810.83 v1(1468.5,1750.98)
TRUNK: R18.2 T5.1 U1.10 U5.2 | length 1739.1
  Top Layer w6: v1(594.49,1662.4) 621.72,1662.4 693.38,1590.74 837.6,1590.74 861.22,1614.36 v1(861.22,1615.16) ; T5.1 600.39,711.02 542.32,769.09 R18.2 542.32,773.03 703.93,934.64 703.93,1471.46 792.21,1559.74 v1(836.61,1559.74)
  Bottom Layer w6: U5.2 548.52,1710.04 594.49,1664.07 v1(594.49,1662.4) ; v1(836.61,1559.74) 861.22,1584.35 v1(861.22,1615.16) 876.46,1599.92 908.74,1599.92 936.02,1572.64 U1.10
TXD: J1.5 U1.35 | length 391.2
  Bottom Layer w6: U1.35 1808.07,1272.64 1887.6,1352.17 J1.5
VBAT_DIV: R24.2 T1.1 U1.26 U5.7 | length 1589.9
  Top Layer w6: v1(384.84,1712.6) R24.2 ; T1.1 482.28,1775.59 543.31,1714.57 R24.2 ; v1(607.58,1711.61) 544.29,1711.61 R24.2
  Bottom Layer w6: U5.7 320.18,1711.32 383.56,1711.32 v1(384.84,1712.6) ; v1(607.58,1711.61) 695.32,1799.35 1010.16,1799.35 1086.88,1722.64 U1.26
pads on no net: J1.2 U1.17 U1.18 U1.19 U1.20 U1.21 U1.22 U1.24 U1.32 U1.33 U2. U2.1 U3.1 U3.7 U3.8 U3.10 U3.12 U3.13 U3.14 U3.15 U3.16 U3.18 U3.21 U3.22 U3.23 U3.24 U3.26 U3.27 U4.2 U4.4 U4.5 U4.6 U4.7 U4.9 U4.10 U4.11 U4.13 U4.16 U4.17 U4.18 U4.20

## Polygon pours and split planes (outlines as drawn)
GND on Bottom Layer "GND_L02_P000" (solid, remove dead copper, pour order 0): 0,0 0,2795.28 2519.68,2795.28 2519.68,0

## Keep-outs
Keep-Out Layer:
  the board outline again, w5

## Silkscreen, mask and mechanical layers (free items; w line width, h text height)
Top Overlay:
  lines w6: 127.95,797.24 147.64,816.93 ; 127.95,836.61 147.64,816.93 ; 177.17,728.35 cw(c147.64,767.72) 147.64,816.93 ; 236.22,2021.06 ccw(c236.22,2165.35) 236.22,2309.65 ; 1076.18,0 cw(c1220.47,0) 1364.76,0 ; 2155.51,2024.41 cw(c2155.51,2168.7) 2155.51,2312.99 ; 147.64,816.93 147.64,816.93
  text "+12" at 1172.37,2720.6 h45
  text "+3.3" at 1352.49,2719.61 h45
  text "GND" at 927.29,2629.06 h45
  text "IGN" at 552.29,1980.44 h45
  text "VBAT" at 243.24,1883 h45
  text "ILL" at 801.31,1882.02 h45
  text "DTR" at 2066.07,1859.38 h45
  text "GND" at 1694.02,1856.43 h45
  text "+V" at 124.11,754.03 h40
  text "RW" at 385.7,412.53 h45 r90
  text "SCL" at 2111.09,382.02 h45 r90
  text "SDA" at 2200.66,381.03 h45 r90
  text "ROOF" at 492,330.83 h45 r90
  text "TRUNK" at 605.19,280.64 h45 r90
Mechanical 1:
  the board outline again, w40

## Dimensions
275.35,2161.67 to 98.43,1779.53 on Mechanical 13
0,0 to 1222.44,1207.68 on Mechanical 13
0,0 to 1222.44,1207.68 on Mechanical 13

## Text inside footprints (layer, text, board x,y; h text height)
J1: Top Overlay "GND" at 2060.24,1727.17 h50; Top Overlay "CTS" at 2060.24,1627.17 h50; Top Overlay "5V" at 2060.24,1527.17 h50; Top Overlay "TXD" at 2060.24,1427.17 h50; Top Overlay "RXD" at 2060.24,1327.17 h50; Top Overlay "RTS" at 2060.24,1227.17 h50
LS1: Mechanical 13 "+" at 2097.44,2463.58 h50; Mechanical 13 "-" at 1656.5,2471.46 h50; Bottom Overlay "+" at 2097.44,2463.58 h50; Bottom Overlay "-" at 1656.5,2471.46 h50
U1: Mechanical 13 "ANTENNA" at 1056.1,975.39 h70 r180